# Altium PCB Forward.PcbDoc
Units mm, origin at the board's own origin, x right, y up, seen from the top; angles counter-clockwise.
Board outline 69.98 x 55.5 mm, 2 copper layers (Top Layer, Bottom Layer); 13 components, 11 nets, 33 pads, 2 vias.
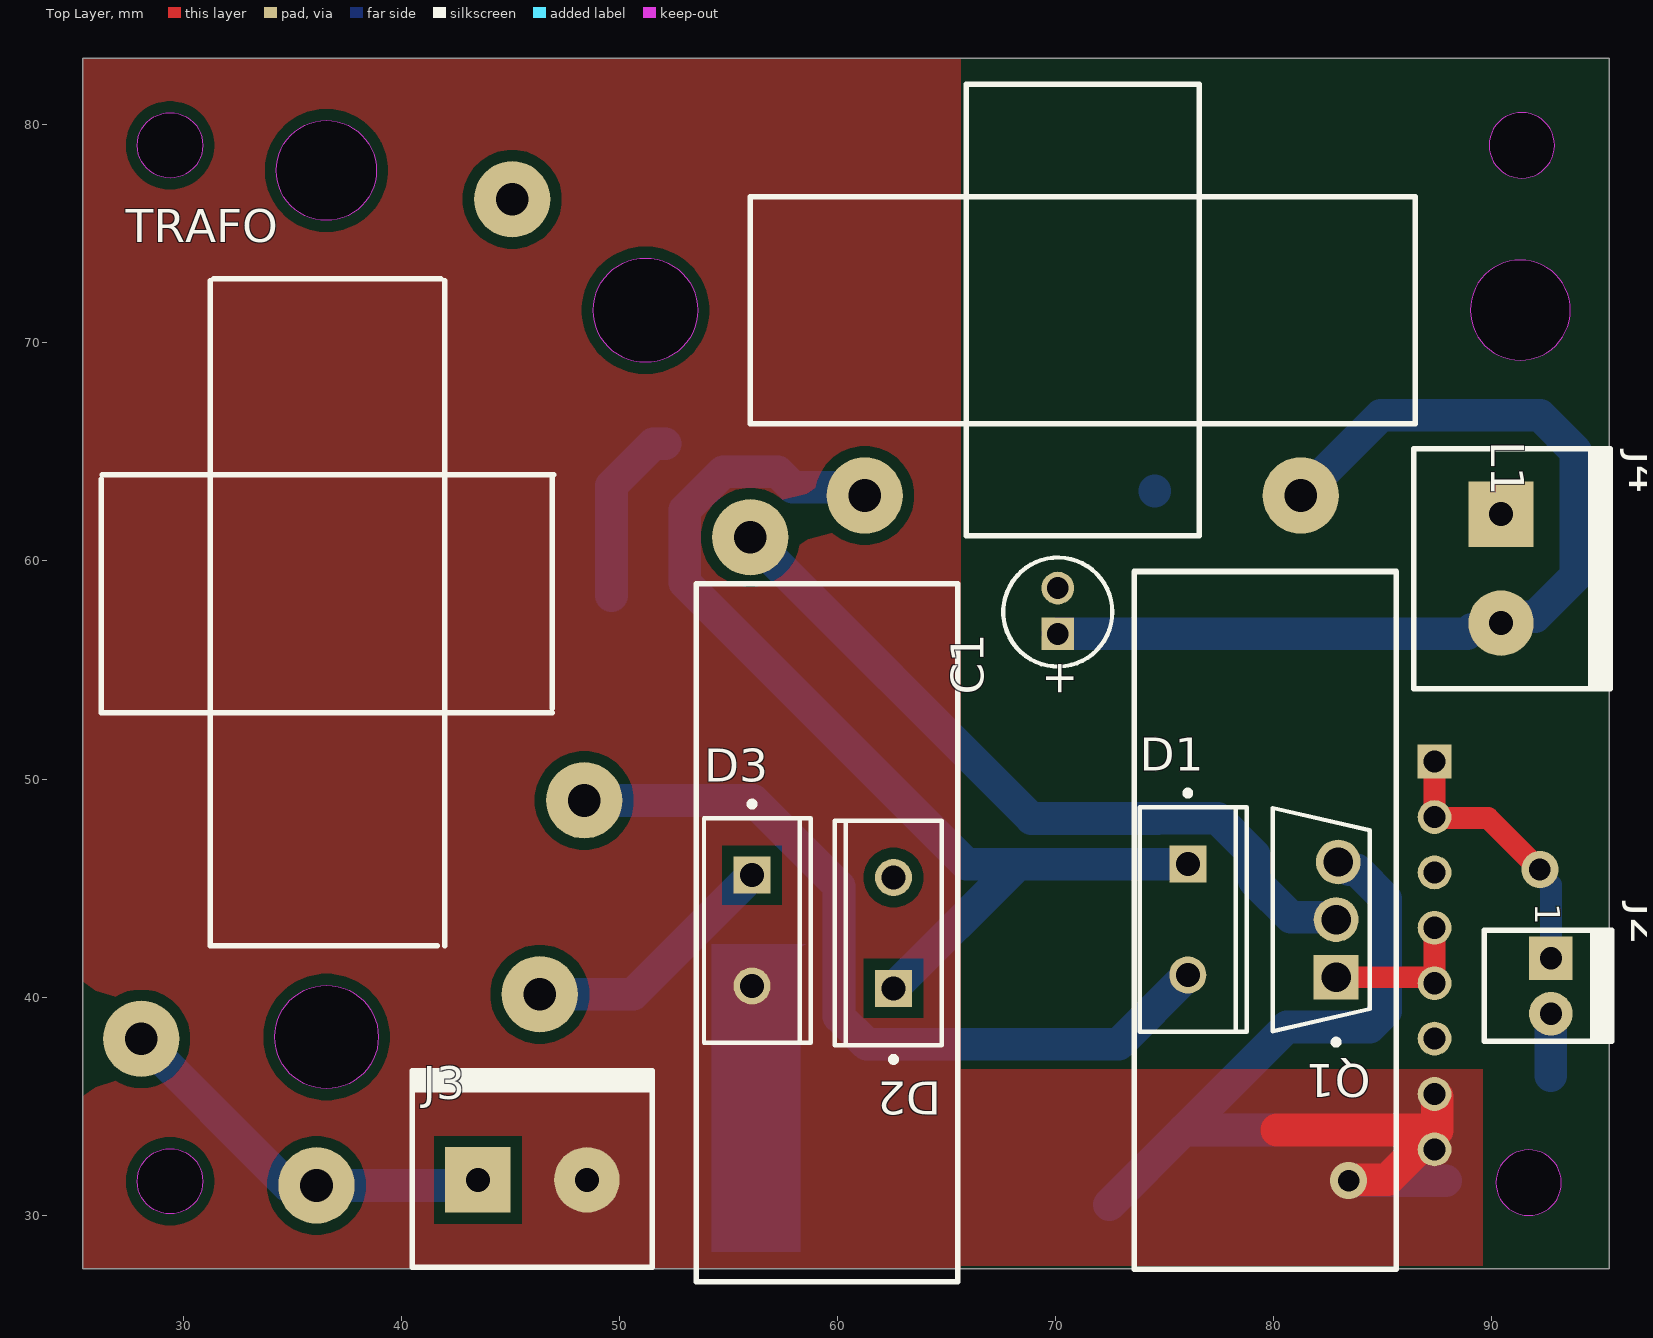
[diagram p0: Top Layer view]
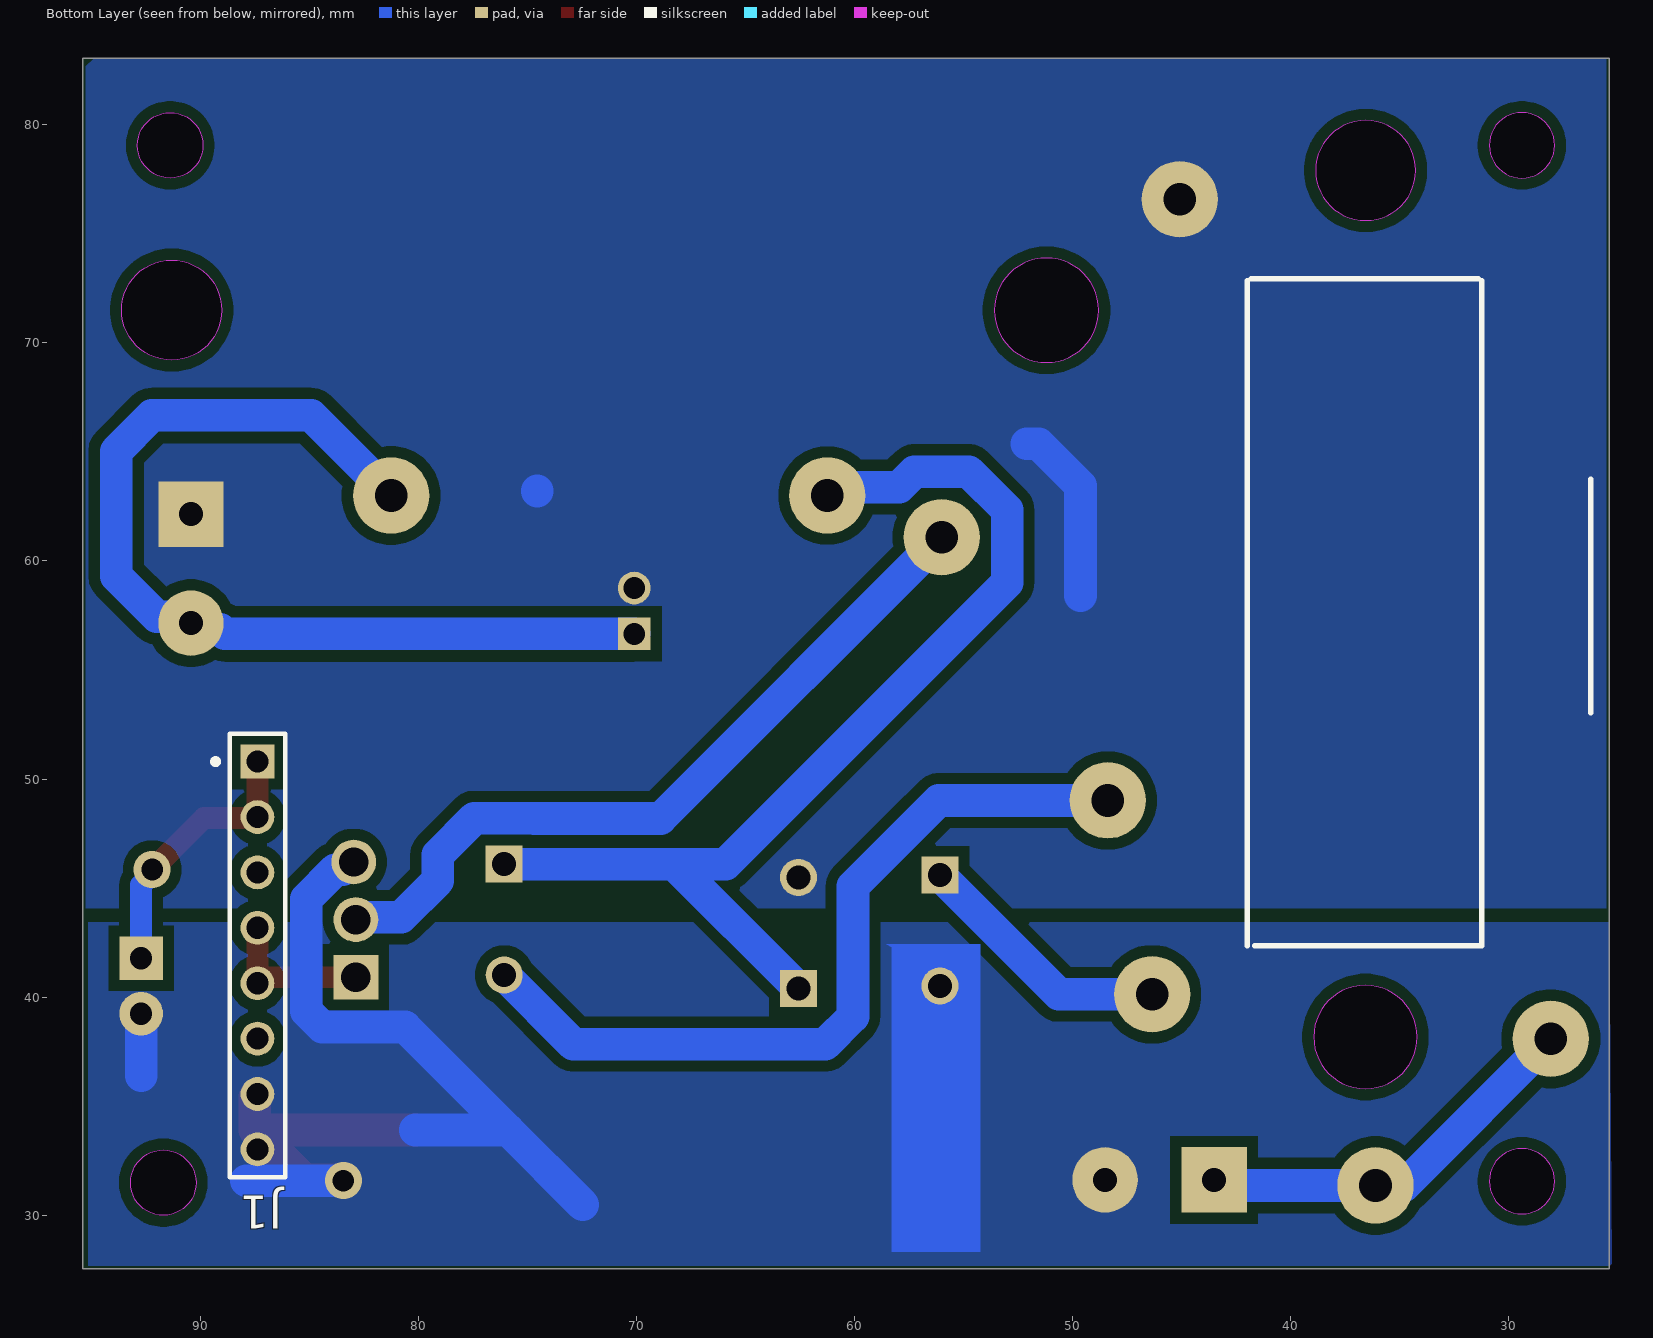
[diagram p1: Bottom Layer view, seen from below]

## Layer stack, top to bottom
Top Solder: solder mask 0.0102, Solder Resist, Dk 3.5
Top Layer: signal copper 0.0356
Dielectric 1: dielectric 0.32, FR-4, Dk 4.8
Bottom Layer: signal copper 0.0356
Bottom Solder: solder mask 0.0102, Solder Resist, Dk 3.5

## Board outline
25.4,27.559 25.4,83.058 95.377,83.058 95.377,27.559
cut-out: 29.4,30.059 cw(c29.4,31.559) 27.9,31.559 cw(c29.4,31.559) 29.4,33.059 cw(c29.4,31.559) 30.9,31.559 cw(c29.4,31.559)
cut-out: 90.194,31.496 ccw(c91.694,31.496) 91.694,29.996 ccw(c91.694,31.496) 93.194,31.496 ccw(c91.694,31.496) 91.694,32.996 ccw(c91.694,31.496)
cut-out: 89.877,79.058 ccw(c91.377,79.058) 91.377,77.558 ccw(c91.377,79.058) 92.877,79.058 ccw(c91.377,79.058) 91.377,80.558 ccw(c91.377,79.058)
cut-out: 29.4,77.558 cw(c29.4,79.058) 27.9,79.058 cw(c29.4,79.058) 29.4,80.558 cw(c29.4,79.058) 30.9,79.058 cw(c29.4,79.058)
cut-out: 51.2,69.101 cw(c51.2,71.495) 48.805,71.495 cw(c51.2,71.495) 51.2,73.89 cw(c51.2,71.495) 53.594,71.495 cw(c51.2,71.495)
cut-out: 89.013,71.501 ccw(c91.309,71.501) 91.309,69.205 ccw(c91.309,71.501) 93.605,71.501 ccw(c91.309,71.501) 91.309,73.797 ccw(c91.309,71.501)
cut-out: 36.576,35.801 cw(c36.576,38.174) 34.203,38.174 cw(c36.576,38.174) 36.576,40.547 cw(c36.576,38.174) 38.949,38.174 cw(c36.576,38.174)
cut-out: 36.566,75.611 cw(c36.566,77.904) 34.273,77.904 cw(c36.566,77.904) 36.566,80.197 cw(c36.566,77.904) 38.859,77.904 cw(c36.566,77.904)

## Design rules (kind name [scope] priority, off if disabled: settings)
Clearance [All] p1: gap=0.508 ignorepadtopadclearanceinfootprint=FALSE
Height [All] p1: minheight=0 maxheight=35 prefheight=12.7
PlaneClearance [All] p1: clearance=1
PlaneConnect Full_Connect_Pads_to_Zone [All] p1: planeconnectstyle=Direct reliefexpansion=0.508 reliefentries=4 reliefconductorwidth=0.254 reliefairgap=0.254
PolygonConnect [All] p1: connectstyle=Direct reliefconductorwidth=1 reliefentries=4 polygonreliefangle="90 Angle" airgapwidth=1
RoutingVias [All] p1: holewidth=1 width=2 viastyle="Through Hole" minholewidth=1 minwidth=2 maxholewidth=5 maxwidth=5
SolderMaskExpansion [All] p1: expansion=0.102 istentingtop=FALSE
SupplyNets "Schematic Supply Nets_2" [InNet('GND')] p1: voltage=0.000
SupplyNets "Schematic Supply Nets_1" [InNet('GND_P')] p2: voltage=0.000
SupplyNets "Schematic Supply Nets" [InNet('GND_S')] p3: voltage=0.000
Width [ALL - (InNet('NetD1_3') OR InNet('NetD1_1') OR InNet('12V5') OR InNet('100V') OR InNet('GND_P') OR InNet('GND_S') OR InNet('NetD3_1') OR InNet('NetQ1_2'))] p1: maxlimit=1 minlimit=1 preferedwidth=1
Width Width_S [(InNet('NetD1_3') OR InNet('NetD1_1') OR InNet('12V5') OR InNet('GND_S'))] p2: maxlimit=1.5 minlimit=1.5 preferedwidth=1.5
Width Width_P [(InNet('100V') OR InNet('GND_P') OR InNet('NetD3_1') OR InNet('NetQ1_2'))] p3: maxlimit=1.5 minlimit=1.5 preferedwidth=1.5
27 further rules are at their usual default settings.

## Classes and differential pairs
component class Forward: C1 D1 D2 D3 J1 J2 J3 J4 L1 Q1 TRAFO

## Components (designator, comment, footprint, x,y, rotation, side; value= is the part's Value field where it differs from the comment)
C1 "4.7uF" Capacitor 70.104,57.658 r90 top
D1 "D1" MUR840 76.113,43.557 r0 top
D2 "D2" MUR840 62.522,42.947 r180 top
D3 "D3" MUR840 56.134,43.053 r0 top
J1 "header 8pin" "Header 8pin" 87.376,41.91 r270 bottom
J2 "Con_Molex_2_pin" CON_MOLEX_2_vias 92.71,41.783 r270 top
J3 "VIN" Borne_KRE_2pin 43.514,31.623 r0 top
J4 "VOUT" Borne_KRE_2pin 90.424,62.15 r270 top
L1 "500uH" Indutor 71.247,71.501 r270 top
Q1 "IRF740" FP-X15-0364-MFG 82.177,43.557 r180 top
TRAFO "Trafo" Trafo_NEE_30/14 36.576,58.674 r0 top
? "Comment" Dissipador 78.613,27.518 r90 top
? "Comment" Dissipador 60.521,58.947 r270 top

## Footprints (in the part's own frame and the unit in brackets; to place one, negate y for a bottom-side part, rotate by r counter-clockwise, add the part's x,y. Pads: shape width x height; smd on the part's side, far side on the other; paste and mask are expansions set on the pad)
Borne_KRE_2pin [mm]
  rect 3x3 hole 1.1: 1(0,0)
  round 3 hole 1.1: 2(5,0)
  silkscreen extent -3,-4 8,5
Capacitor [mm]
  rect 1.5x1.5 hole 1: 1(-1,0)
  round 1.5 hole 1: 2(1.1,0)
  silkscreen extent -2.5,-2.5 2.5,2.5, body extent -2.5,-2.5 2.45,2.5, height 12
CON_MOLEX_2_vias [mm]
  rect 2x2 hole 1.016: 1(0,0)
  round 2 hole 1.016: 2(2.54,0)
  silkscreen extent -1.28,-3.05 3.85,2.8
Dissipador [mm]
  silkscreen extent 0,-7 32,5
FP-X15-0364-MFG [mm]
  rect 2.05x2.05 hole 1.35 paste-2539.97 mask+0: 1(-0.685,2.64)
  round 2.05 hole 1.35 paste-2539.97 mask+0: 2(-0.685,0) 3(-0.785,-2.64)
  silkscreen extent -2.22,-5.12 2.22,5.74, body extent -2.42,-5.36 2.42,5.36, height 0.25
"Header 8pin" [mm]
  rect 1.55x1.55 hole 1.016: 1(-8.89,0)
  round 1.55 hole 1.016: 2(-6.35,0) 3(-3.81,0) 4(-1.27,0) 5(1.27,0) 6(3.81,0) 7(6.35,0) 8(8.89,0)
  silkscreen extent -10.16,-2.05 10.16,1.27
Indutor [mm]
  round 3.5 hole 1.5: 1(8.5,-10) 2(8.5,10)
  silkscreen extent -10.35,-15.25 10.35,15.25, body extent -10.35,-15.22 10.3,15.23, height 30.9
MUR840 [mm]
  rect 1.7x1.7 hole 1.1: 1(-0.05,2.54)
  round 1.7 hole 1.1: 3(-0.05,-2.54)
  silkscreen extent -2.25,-5.15 2.64,5.92, body extent -2.23,-5.15 2.62,5.15, height 19.05
Trafo_NEE_30/14 [mm]
  round 3.5 hole 1.5: P1(-0.463,-27.305) P2(19.431,2.413) S1(11.811,-9.652) S2(8.509,17.907) T1(9.779,-18.542) T2(-8.498,-20.585)
  silkscreen extent -10.33,-16.33 10.42,14.28, body extent -10.33,-16.33 10.47,14.17, height 28

## Part data
C1: library part "Capacitor Eletro"
D1 D2 D3: library part mur840
J3 J4: library part Borne_KRE_2_vias
L1: library part Indutor
TRAFO: "Transformador de 3 enrolamentos"

## Via types
v1: diameter 1.7, hole 1, Top Layer to Bottom Layer, 2 vias

## Nets (pads, with @x,y where several pads share a name; then routed paths per layer and width w, separated by ;. In a path a pad name is that pad's centre, name@x,y a point inside that pad or via, vN(x,y) a via of type N, cw(c..) or ccw(c..) an arc to the next point about the centre after c; other vN are vias at no path point)
12V5: C1.1 J4.2 L1.2 | length 45.4
  Bottom Layer w1.5: C1.1 88.871,56.658 89.076,56.863 89.731,56.863 90.305,57.437 91.984,57.437 93.853,59.306 93.853,65.034 92.212,66.675 84.921,66.675 L1.2
100V: J3.1 TRAFO.P1 TRAFO.T2 | length 18.7
  Bottom Layer w1.5: TRAFO.T2@27.813,38.354 34.798,31.369 TRAFO.P1 43.26,31.369 J3.1
GATE: J1.4 J1.5 Q1.1 | length 7.2
  Top Layer w1: Q1.1 86.951,40.917 87.227,40.64 J1.5 J1.4
GND: 
GND_P: D3.3 J1.7 J1.8 J2.2 J3.2 Q1.3 | length 54.2
  Top Layer w1.5: 80.137,33.909 87.503,33.909 ; v1(83.439,31.586) 83.477,31.625 85.219,31.625 87.503,33.909 ; J1.7@87.503,35.433 87.503,33.909
  Bottom Layer w1.5: 56.046,36.157 56.046,39.155 56.046,40.475 D3.3 ; 72.463,30.48 75.892,33.909 ; 80.137,33.909 75.892,33.909 ; Q1.3 83.111,46.197 83.468,45.84 83.708,45.84 83.71,45.837 83.81,45.837 85.145,44.502 85.145,39.37 84.408,38.634 80.616,38.634 75.892,33.909 ; v1(83.439,31.586) 83.531,31.586 87.884,31.586 ; 92.71,36.412 J2.2
GND_S: C1.2 D2.3 J4.1 TRAFO.S2 | length 8.3
  Bottom Layer w1.5: 49.639,58.42 49.639,63.45 51.562,65.373 52.103,65.373 ; 74.549,63.203 74.549,63.223
NetD1_1: D1.1 D2.1 L1.1 | length 49.7
  Bottom Layer w1.5: L1.1@61.906,63.384 60.864,63.384 57.964,63.384 57.253,64.095 54.761,64.095 52.999,62.333 52.999,59.015 65.917,46.097 68.262,46.097 ; D2.1 68.262,46.097 ; D1.1 68.262,46.097
NetD1_3: D1.3 TRAFO.S1 | length 37.1
  Bottom Layer w1.5: TRAFO.S1 52.717,49.022 52.725,49.014 56.142,49.014 57.455,47.701 58.192,46.964 60.071,45.085 60.071,39.116 61.341,37.846 72.892,37.846 D1.3
NetD3_1: D3.1 TRAFO.T1 | length 12
  Bottom Layer w1.5: TRAFO.T1 50.623,40.132 D3.1
NetQ1_2: Q1.2 TRAFO.P2 | length 34.8
  Bottom Layer w1.5: TRAFO.P2 68.897,48.197 74.684,48.197 74.692,48.205 77.434,48.205 79.116,46.523 79.116,45.344 80.798,43.662 82.757,43.662 Q1.2
VIN_COMANDO: J1.1 J1.2 J2.1 | length 12.6
  Top Layer w1: J1.1 J1.2 87.427,48.209 89.84,48.209 v1(92.202,45.847)
  Bottom Layer w1: v1(92.202,45.847) 92.202,45.658 92.71,45.15 J2.1
pads on no net: J1.3 J1.6

## Polygon pours and split planes (outlines as drawn)
GND_S on Bottom Layer "GND_S_L02_P015" (solid, remove dead copper, pour order 15): 25.527,44.069 95.25,44.069 95.25,82.677 94.869,83.058 25.527,83.058
GND_P on Bottom Layer "GND_P_L02_P010" (solid, remove dead copper, pour order 10): 95.123,43.434 89.662,43.434 86.487,43.434 82.862,43.434 82.169,43.434 25.4,43.434 25.273,27.686 46.291,27.686 95.123,27.686 95.123,43.434 95.123,42.037
GND_P on Top Layer "GND_P_L01_P014" (solid, remove dead copper, pour order 14): 89.578,36.703 65.532,36.703 65.532,27.686 89.578,27.686
GND_P on Top Layer "GND_P_TOP" (solid, remove dead copper, pour order 7): 25.4,83.058 65.659,83.058 65.659,27.559 25.4,27.559

## Other copper
Bottom Layer:
  region net GND_P: 58.547,42.418 54.229,42.418 54.229,28.321 58.293,28.321 58.293,42.291
Multi-Layer:
  pour cut-out: 36.453,75.611 cw(c36.453,77.904) 34.16,77.904 cw(c36.453,77.904) 36.453,80.197 cw(c36.453,77.904) 38.746,77.904 cw(c36.453,77.904)

## Silkscreen, mask and mechanical layers (free items; w line width, h text height)
Mechanical 1:
  circle w0.254: c29.4,79.058 r1.5
  circle w0.254: c29.4,31.559 r1.5
  circle w0.254: c91.694,31.496 r1.5
  circle w0.254: c91.377,79.058 r1.5
  circle w0.254: c91.309,71.501 r2.296
  circle w0.254: c51.2,71.374 r2.394
  circle w0.254: c36.566,77.851 r2.293
  circle w0.254: c36.459,38.227 r2.373
  lines w0.508: 25.4,27.559 95.377,27.559 95.377,83.058 25.4,83.058 25.4,27.559

## Text inside footprints (layer, text, board x,y; h text height)
C1: Top Overlay "+" at 70.841,53.75 h1.5 r90
J2: Top Overlay "1" at 91.985,44.308 h1.14 r270